# EAGLE board vein_brd (EAGLE 7.0.0)
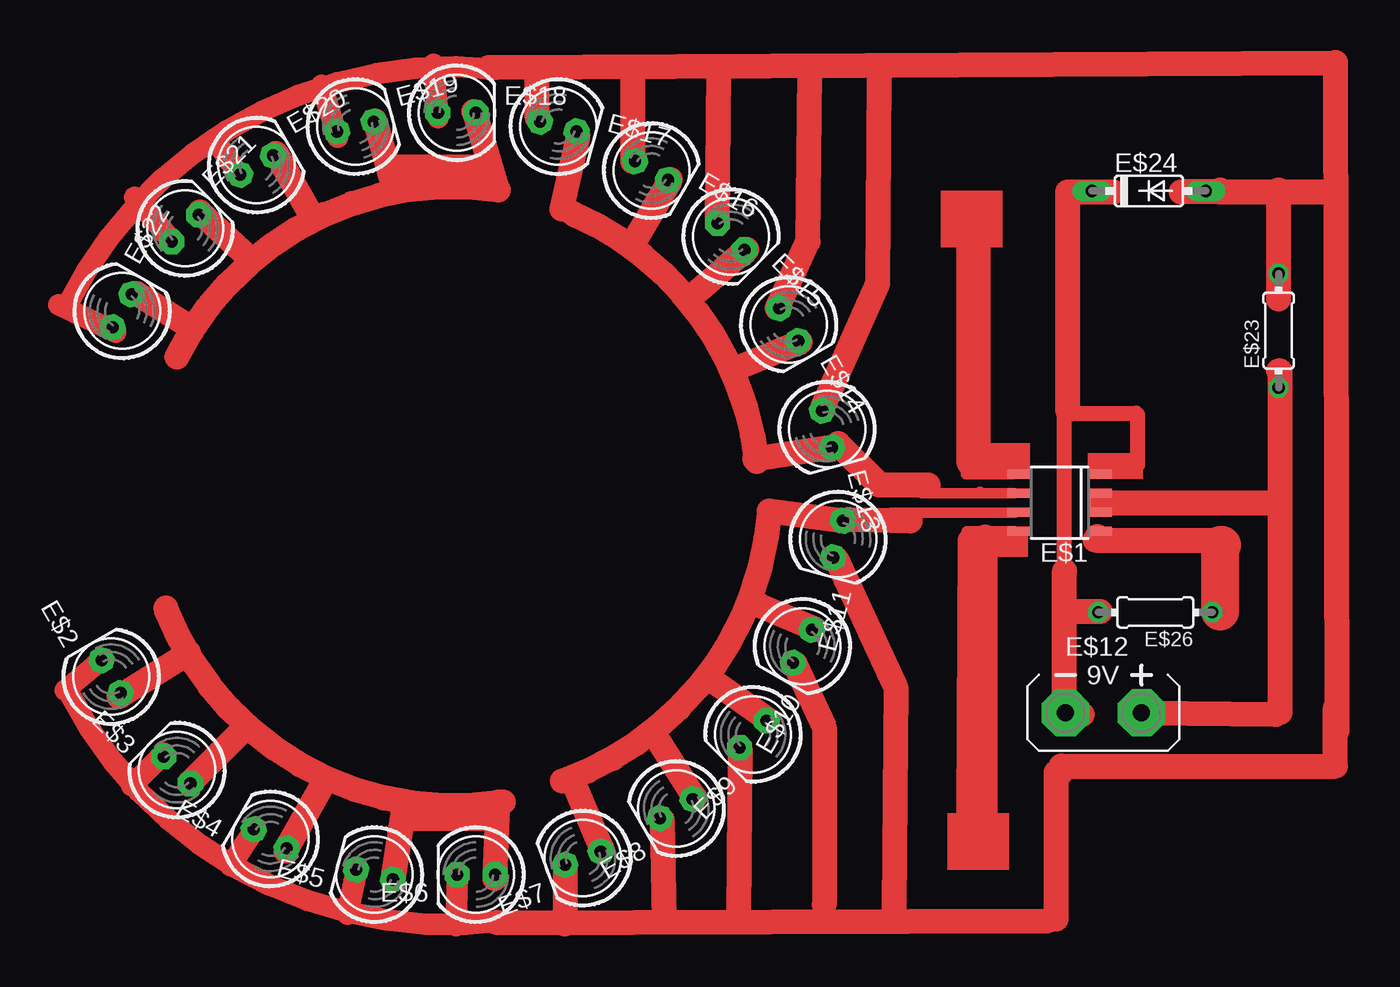
[diagram p0: board, top side]
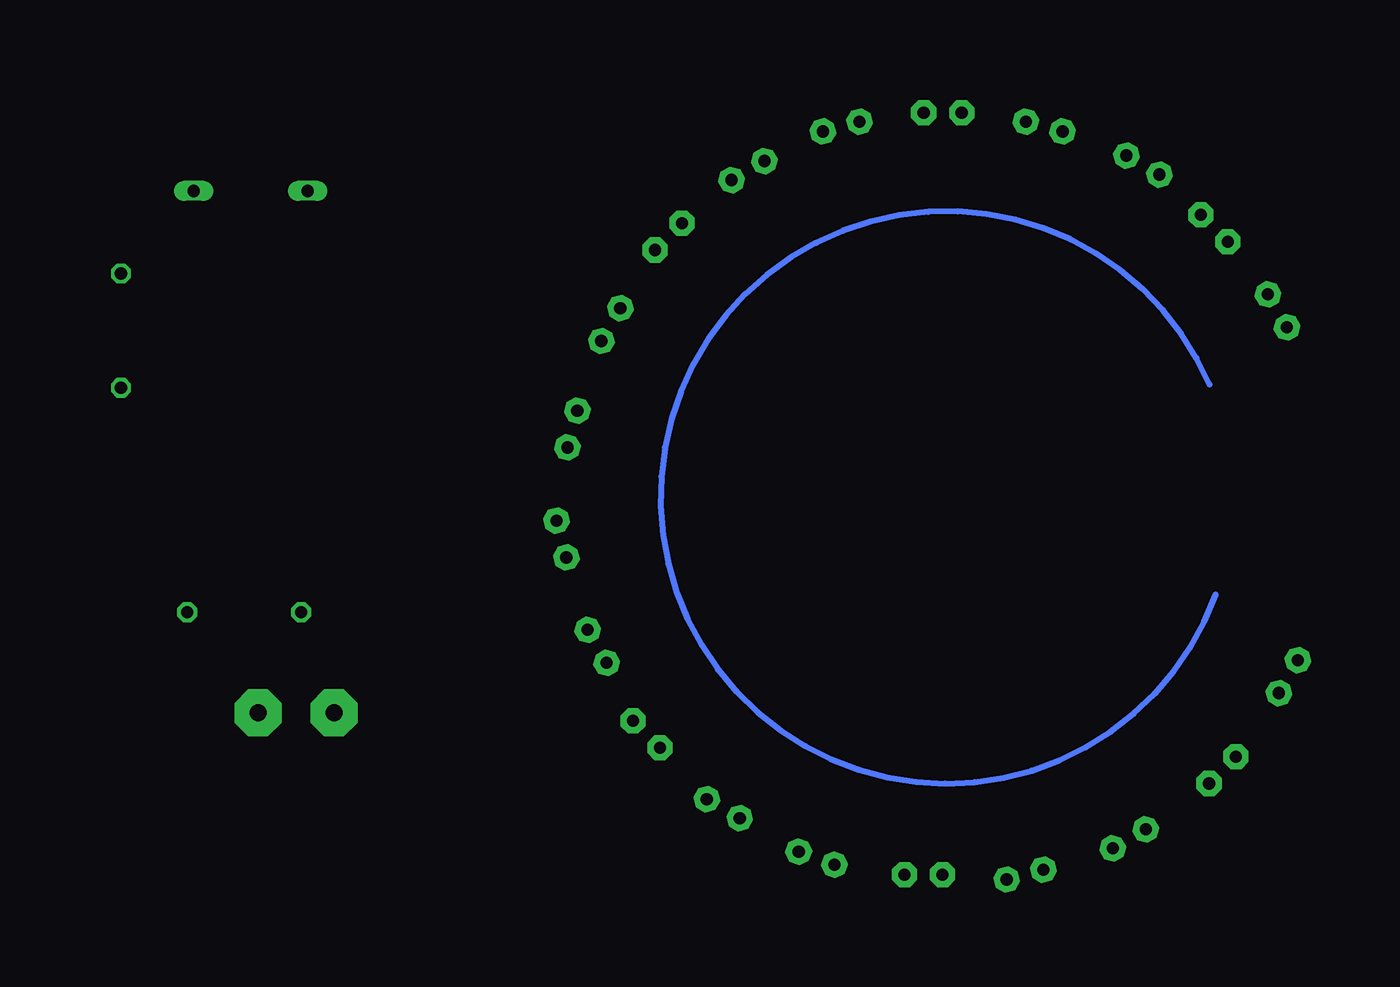
[diagram p1: board, bottom side, seen from below]

No outline drawn. Coordinates in mm, seen from the top.
Copper layers (1*16): Top 0.035mm / dielectric 1.5mm / Bottom 0.035mm
Design rules "default": minimum track width 10mil, minimum drill 24mil, track to track 8mil, track to pad 8mil, pad to pad 8mil, via to via 8mil, smd to smd 8mil, copper to edge 40mil, drill to drill 8mil, minimum pad ring 10mil, minimum via ring 8mil, stop-mask expansion 4mil, vias tented up to drill 0mil, thermal gap 10mil

## Footprints (pad centres in the part's own frame; a part is rotated, then mirrored left to right if it is on the bottom)
SOIC8 = smd 0.6 x 1.5: 1 -1.905,-2.75; 2 -0.635,-2.75; 3 0.635,-2.75; 4 1.905,-2.75; 5 1.905,2.75; 6 0.635,2.75; 7 -0.635,2.75; 8 -1.905,2.75
LED5MM = drill 0.813 pad 1.676 octagon: A -1.27,0; K 1.27,0
AB9V = drill 1.118 pad 3.15 octagon: + 0,2.54; - 0,-2.54
0204/7 = drill 0.813 octagon: 1 -3.81,0; 2 3.81,0
DIODE_DO35-7 = drill 0.813 long: A 3.81,0; C -3.81,0

## Placement (x,y rotation side)
E$1  [SOIC8]  78.6,45.41 90 top
E$2  [LED5MM]  15.21,33.8 120 top
E$3  [LED5MM]  19.61,27.56 135 top
E$4  [LED5MM]  25.84,22.96 150 top
E$5  [LED5MM]  32.81,20.58 165 top
E$6  [LED5MM]  39.59,20.58 180 top
E$7  [LED5MM]  46.74,21.68 200 top
E$8  [LED5MM]  52.97,24.99 210 top
E$9  [LED5MM]  58.1,29.95 225 top
E$10  [LED5MM]  61.4,35.82 240 top
E$11  [LED5MM]  63.79,42.99 255 top
E$12  [AB9V]  81.52,31.38 270 top
E$13  [LED5MM]  63.05,50.34 285 top
E$14  [LED5MM]  60.49,57.32 300 top
E$15  [LED5MM]  56.64,63.2 315 top
E$16  [LED5MM]  51.32,67.61 330 top
E$17  [LED5MM]  45.09,70.55 345 top
E$18  [LED5MM]  38.31,71.46 0 top
E$19  [LED5MM]  31.53,70.55 15 top
E$20  [LED5MM]  24.93,67.97 30 top
E$21  [LED5MM]  20.16,63.75 45 top
E$22  [LED5MM]  15.95,58.24 60 top
E$23  [0204/7]  93.23,56.92 90 top
E$24  [DIODE_DO35-7]  84.55,66.24 0 top
E$26  [0204/7]  84.99,38.09 180 top

## Library data of the parts
E$1 = on-semiconductor
E$2-E$11 E$13-E$22 = adafruit
E$12 = battery
E$23 E$26 = rcl
E$24 = eagle-ltspice

## Tracks (layer width: path | path; a pad name or v marks a point on that pad's centre or on a via)
S$2
  Bottom 0.406: 20.49,53.32 arc-317 20.07,39.28
S$3
  Top 1.422: 12.25,58.53 arc-70 40.93,74.39
S$4
  Top 1.422: 41.63,17.48 arc-70 12.4,32.69
S$5
  Top 1.422: 15.5,56.8 11.71,58.64
S$6
  Top 1.422: 19.3,62.88 16.8,65.81
S$7
  Top 1.422: 23.74,67.33 22.11,69.72
S$8
  Top 1.422: 30.35,69.83 29.27,73.3
S$9
  Top 1.422: 37.07,71.13 36.75,74.71
S$10
  Top 1.422: 14.2,34.64 12.14,32.91
S$11
  Top 1.422: 18.75,28.67 16.59,26.5
S$12
  Top 1.422: 24.82,23.67 23.2,21.18
S$13
  Top 1.422: 31.65,21.07 31,17.92
S$14
  Top 1.422: 38.37,20.52 38.27,17.16
S$15
  Top 1.676: 40.98,17.38 77.72,17.48
S$16
  Top 1.676: 40.43,74.5 97.02,74.82 97.13,30.19
S$17
  Top 1.676: 43.69,71.13 43.69,74.28
S$18
  Top 1.676: 50.08,68.2 50.08,74.06
S$19
  Top 1.676: 55.72,64.29 55.83,74.28
S$20
  Top 1.676: 59.73,58.42 61.79,62.88 61.9,74.17
S$21
  Top 1.676: 62.77,51.8 66.45,60.05 66.56,73.95
S$22
  Top 1.676: 45.53,21.07 45.53,17.27
S$23
  Top 1.676: 52.03,24.22 52.14,17.59
S$24
  Top 1.676: 57.24,28.89 57.13,17.92
S$25
  Top 1.676: 60.92,34.64 62.87,30.41 62.87,18.57
S$26
  Top 1.676: 63.63,41.7 67.53,33.34
S$27
  Top 1.676: 67.64,33.12 67.53,18.35
S$28
  Top 1.676: 19.62,55.17 arc-72 41.09,66.32
S$29
  Top 1.676: 41.41,25.41 arc-78 18.87,38.38
S$30
  Top 1.676: 46.07,64.72 arc-60 58.35,48.16
S$31
  Top 1.676: 45.36,26.82 arc67 59.19,44.85 63.96,44.2
S$32
  Top 1.676: 46.4,69.94 45.31,65.05
S$33
  Top 1.676: 52.58,67 50.3,63.09
S$34
  Top 1.676: 57.67,62.33 54.53,59.62
S$35
  Top 1.676: 61.25,56.14 56.8,54.3
S$36
  Top 1.676: 63.2,49.09 58.21,48.33
S$37
  Top 1.676: 48.02,22.26 45.96,27.04
S$38
  Top 1.676: 54.2,25.74 51.6,29.86
S$39
  Top 1.676: 59.08,30.95 55.5,33.45
S$40
  Top 1.676: 62.11,37.03 58.54,38.55
S$41
  Top 1.676: 15.72,32.47 20.38,35.4
S$42
  Top 1.676: 20.49,26.71 24.07,30.3
S$43
  Top 1.676: 26.88,22.15 29.38,26.61
S$44
  Top 1.676: 34.04,20.2 34.8,24.98
S$45
  Top 1.676: 40.87,20.31 41.08,25.41
S$46
  Top 1.676: 16.91,59.4 20.6,57.12
S$47
  Top 1.676: 21.14,64.83 24.39,61.79
S$48
  Top 1.676: 26.23,68.74 28.51,64.72
S$49
  Top 1.676: 32.85,70.91 34.04,66.57
S$50
  Top 1.676: 39.46,71.56 40.98,66.46
S$51
  Top 1.676: 84.12,31.38 93.01,31.28
S$52
  Top 1.676: 81.08,43.14 81.08,43.04
S$53
  Top 1.676: 78.59,31.28 80.11,31.28
S$54
  Top 2.54: 89.32,38.15 89.32,42.6 89.43,42.6
S$55
  Top 0.7: 75.54,43.51 72.4,43.51
S$56
  Top 0.7: 75.59,44.76 72.4,44.76
S$57
  Top 0.7: 75.54,46.06 72.4,46.06
S$58
  Top 0.7: 75.49,47.31 72.34,47.31
S$59
  Top 1.676: 64.5,44.31 68.62,44.2
S$60
  Top 1.676: 72.52,24.54 72.63,42.9
S$61
  Top 1.676: 73.61,43.11 73.61,24.65
S$62
  Top 1.676: 63.78,49.37 66.55,46.6 69.8,46.6
S$63
  Top 0.7: 72.2,44.74 67.32,44.74
S$64
  Top 0.7: 73.28,46.15 73.17,46.05 69.38,46.05
S$65
  Top 2.3: 72.85,48.21 72.85,63.52
S$66
  Top 1.016: 78.92,31.3 78.92,40.86 78.92,51.4 83.69,51.4 83.8,51.3 83.8,47.93
  Top 1.676: 79.35,31.41 78.92,31.84 78.92,40.86
S$67
  Top 1.016: 80.98,47.6 83.47,47.6
S$68
  Top 1.676: 81.3,38.15 79.24,38.15
S$69
  Top 1.676: 81.3,45.32 81.3,45.43 92.79,45.43
S$70
  Top 1.676: 80.98,42.93 89.54,42.93
S$71
  Top 1.676: 93.33,31.41 93.33,54.23 93.23,54.23
S$72
  Top 1.676: 78.38,17.61 78.38,27.39 78.7,27.39 78.7,27.82 97.02,27.82 97.02,31.73 97.13,31.73
S$73
  Top 1.676: 79.13,51.62 79.13,66.18 82.17,66.18
S$74
  Top 1.676: 89.32,66.29 89.32,66.18 | 89.32,66.18 91.17,66.18 96.37,66.18 | 89.32,66.18 86.72,66.18
S$75
  Top 1.676: 93.23,59.01 93.23,66.29
(copper drawn outside any net)
  shapes: Top area x8